# Altium PCB Zavrsni.PcbDoc
Units mil, origin at the board's own origin, x right, y up, seen from the top; angles counter-clockwise.
Board outline 3740.16 x 1968.5 mil, 2 copper layers (Top Layer, Bottom Layer); 18 components, 15 nets, 92 pads, 0 vias.
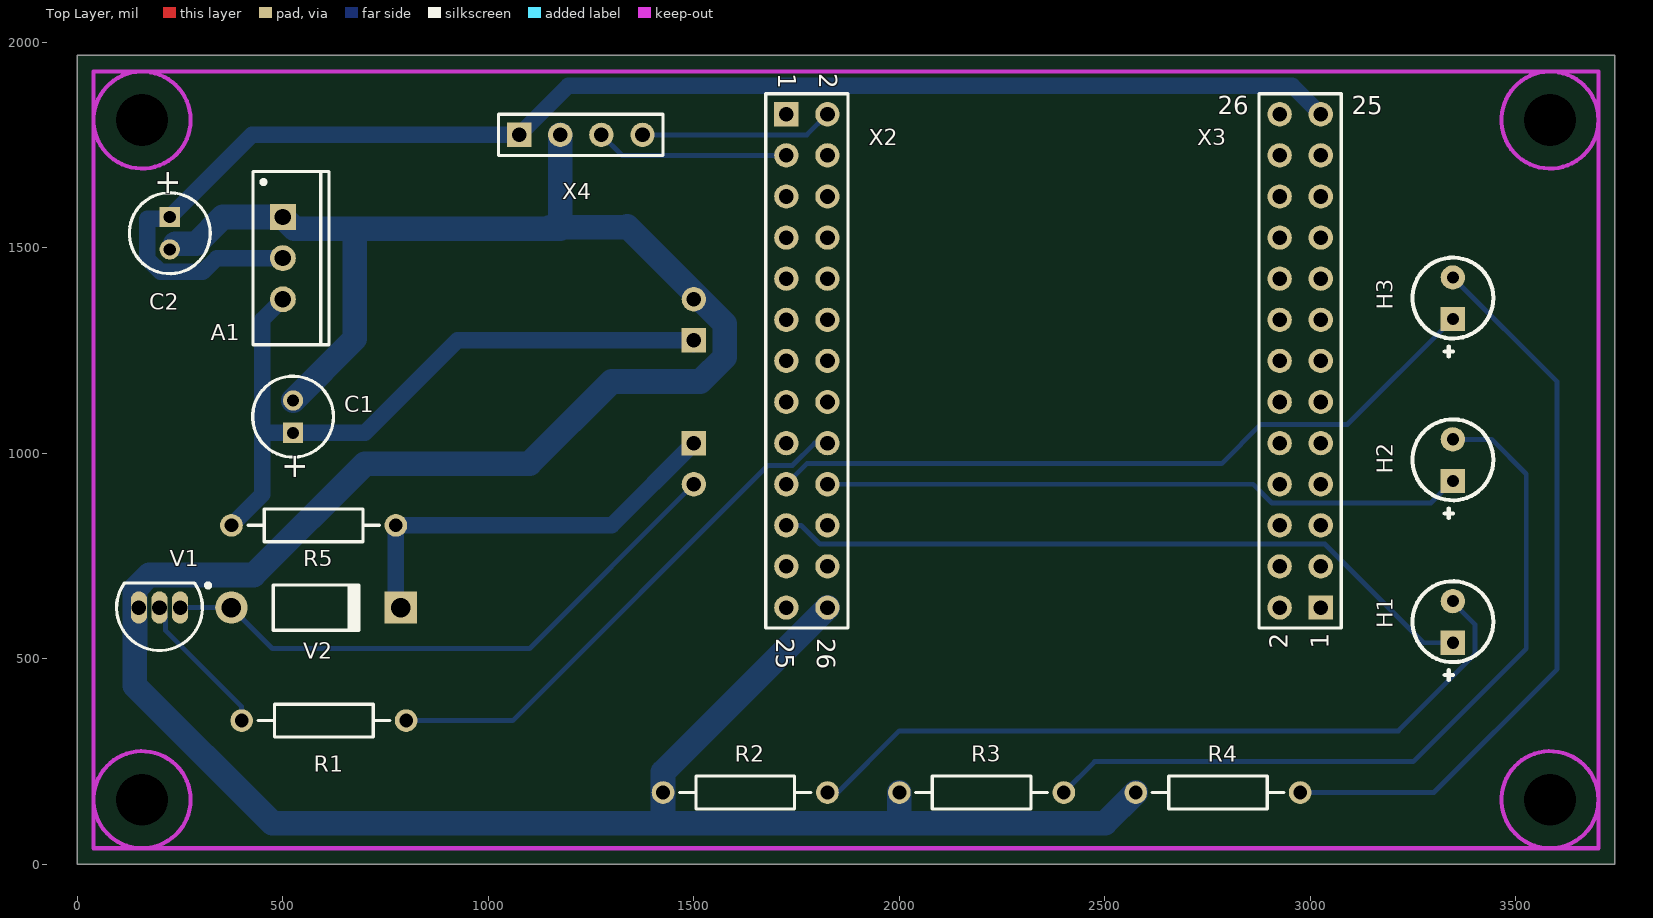
[diagram p0: Top Layer view]
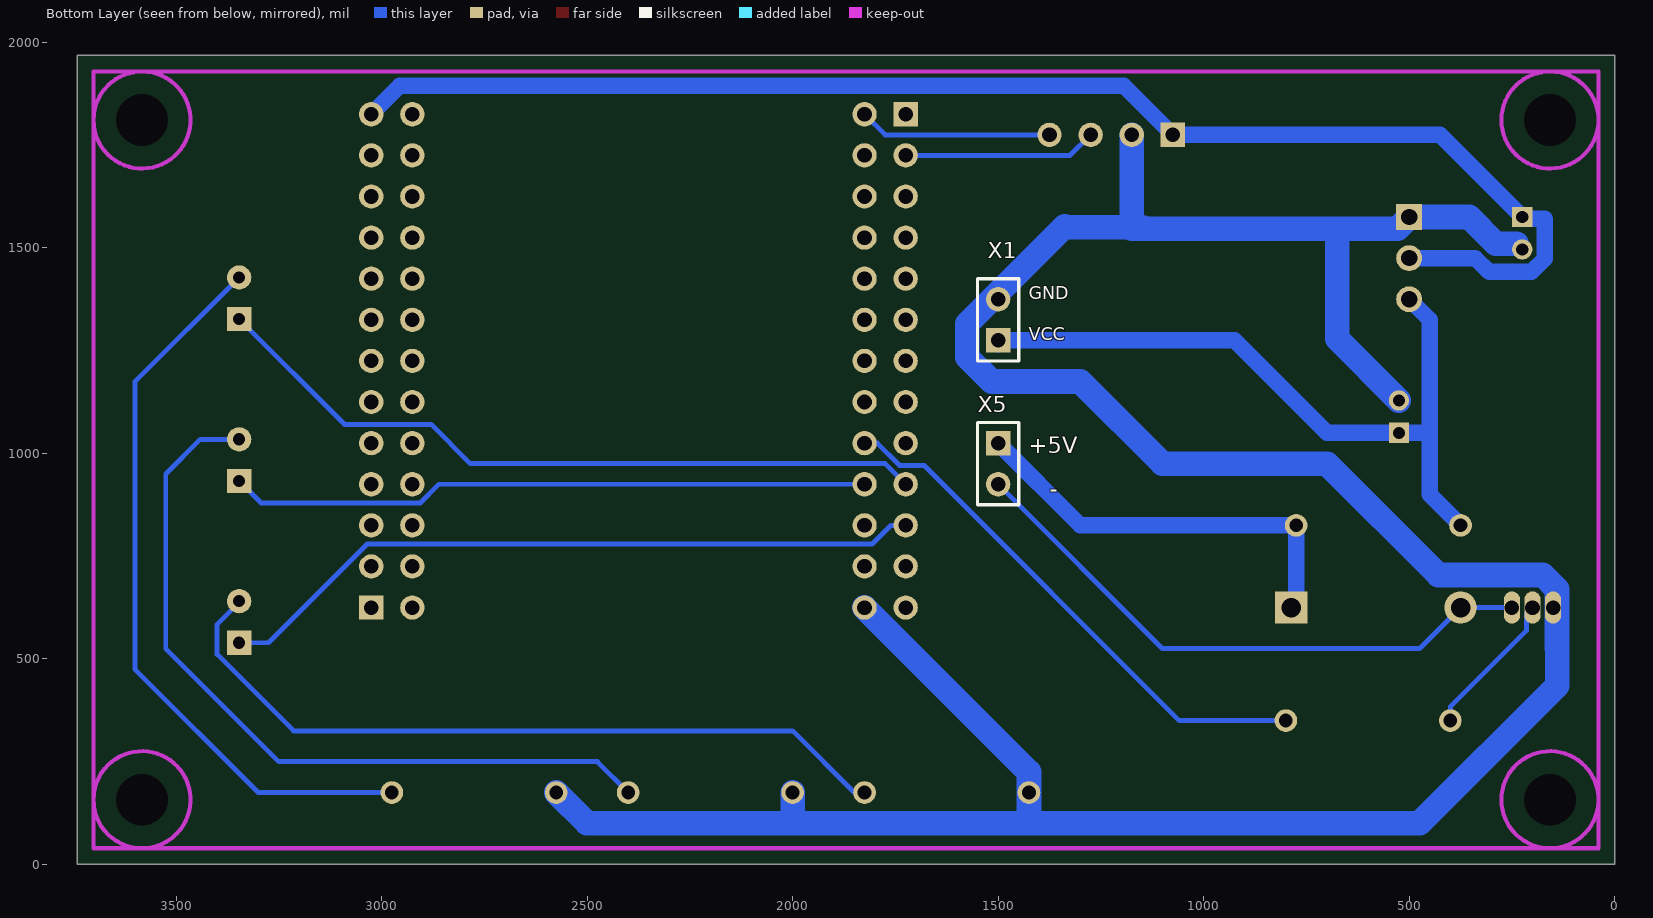
[diagram p1: Bottom Layer view, seen from below]

## Layer stack, top to bottom
Top Solder: solder mask 0.4, Solder Resist, Dk 3.5
Top Layer: signal copper 1.4
Dielectric 1: dielectric 12.6, FR-4, Dk 4.8
Bottom Layer: signal copper 1.4
Bottom Solder: solder mask 0.4, Solder Resist, Dk 3.5

## Board outline
0,0 3740.16,0 3740.16,1968.5 0,1968.5

## Design rules (kind name [scope] priority, off if disabled: settings)
Clearance [All] p1: gap=10
HoleSize [All] p1: absolutevalues=TRUE maxlimit=125.98 minlimit=1 maxpercent=80.000 minpercent=20.000
MinimumSolderMaskSliver [All] p1: minsoldermaskwidth=2
PolygonConnect [All] p1: connectstyle=Relief reliefconductorwidth=10 reliefentries=4 polygonreliefangle="90 Angle" airgapwidth=10
RoutingVias [All] p1: holewidth=28 width=50 viastyle="Through Hole" minholewidth=28 minwidth=50 maxholewidth=28 maxwidth=50
SilkToSolderMaskClearance [IsPad] p1: minsilkscreentomaskgap=2 clearancetoexposedcopper=TRUE
SolderMaskExpansion [All] p1: expansion=4
Width [All] p1: maxlimit=60 minlimit=12 preferedwidth=12
27 further rules are at their usual default settings.

## Components (designator, comment, footprint, x,y, rotation, side; value= is the part's Value field where it differs from the comment)
A1 "LM1117T-3.3" T03B 500,1475 r270 top
C1 "100u/16V" CAPPR2-5x6.8 525,1089.37 r90 top
C2 "10u/16V" CAPPR2-5x6.8 225,1535.63 r270 top
H1 "LED1" "LED dioda" 3346.46,590.55 r90 top
H2 "LED1" "LED dioda" 3346.46,984.25 r90 top
H3 "LED1" "LED dioda" 3346.46,1377.95 r90 top
R1 "4K7" AXIAL-0.4 600,350 r180 top
R2 "1K" AXIAL-0.4 1625,175 r0 top
R3 "1K" AXIAL-0.4 2200,175 r0 top
R4 "1K" AXIAL-0.4 2775,175 r0 top
R5 "68" AXIAL-0.4 575,825 r180 top
V1 "NPN" TO-226-AA 200,625 r90 top
V2 "Diode 1N4004" DO-41 580.91,625 r0 top
X1 "Header 2" HDR1X2 1500,1275 r90 bottom
X2 "Header 13X2" HDR2X13 1725,1825 r270 top
X3 "Header 13X2" HDR2X13 3025,625 r90 top
X4 "Header 4" HDR1X4 1075,1775 r0 top
X5 "Header 2" HDR1X2 1500,1025 r270 bottom

## Footprints (in the part's own frame and the unit in brackets; to place one, negate y for a bottom-side part, rotate by r counter-clockwise, add the part's x,y. Pads: shape width x height; smd on the part's side, far side on the other; paste and mask are expansions set on the pad)
AXIAL-0.4 [mm] "Axial Device, Thru-Hole; 2 Leads; 0.4 in Pin Spacing"
  round 1.4 hole 0.85: 1(-5.08,0) 2(5.08,0)
  silkscreen extent -4.06,-1.02 4.06,1.02
CAPPR2-5x6.8 [mm] "Capacitor, Electrolytic, Radial; Body 5 x 6.8 mm (Dia.xH typ); Pin Spacing 2 mm (typ)"
  rect 1.25x1.25 hole 0.75: 1(-1,0)
  round 1.25 hole 0.75: 2(1,0)
  silkscreen extent -2.5,-2.5 2.5,2.5
DO-41 [mm] "Diode, Axial; Body 5.2 x 2.7 mm (LxDia. max), Lead Dia. 0.86 mm (max)"
  round 2 hole 1.2: 1(-5.23,0)
  rect 2x2 hole 1.2: 2(5.23,0)
  silkscreen extent -2.65,-1.4 2.75,1.4
HDR1X2 [mm] "Connector; Header; 2 Position"
  rect 1.5x1.5 hole 0.9: 1(0,0)
  round 1.5 hole 0.9: 2(2.54,0)
  silkscreen extent -1.27,-1.27 3.81,1.27
HDR1X4 [mm] "Connector; Header; 4 Position"
  rect 1.5x1.5 hole 0.9: 1(0,0)
  round 1.5 hole 0.9: 2(2.54,0) 3(5.08,0) 4(7.62,0)
  silkscreen extent -1.27,-1.27 8.89,1.27
HDR2X13 [mm] "Connector; Header; 13x2 Position"
  rect 1.5x1.5 hole 0.9: 1(0,0)
  round 1.5 hole 0.9: 2(0,2.54) 3(2.54,0) 4(2.54,2.54) 5(5.08,0) 6(5.08,2.54) 7(7.62,0) 8(7.62,2.54) 9(10.16,0) 10(10.16,2.54) 11(12.7,0) 12(12.7,2.54) 13(15.24,0) 14(15.24,2.54) 15(17.78,0) 16(17.78,2.54) 17(20.32,0) 18(20.32,2.54) 19(22.86,0) 20(22.86,2.54) 21(25.4,0) 22(25.4,2.54) 23(27.94,0) 24(27.94,2.54) 25(30.48,0) 26(30.48,2.54)
  silkscreen extent -1.27,-1.27 31.75,3.81
"LED dioda" [mm]
  rect 1.5x1.5 hole 0.75: 1(-1.3,0)
  round 1.5 hole 0.75: 2(1.27,0)
  silkscreen extent -3.6,-2.5 2.5,2.5
T03B [mm] "TO, Thru-Hole, Vertical, Heatsink Mounted; 3 In-Line Leads; Pitch 2.54 mm"
  rect 1.6x1.6 hole 1: 1(-2.54,0)
  round 1.6 hole 1: 2(0,0) 3(2.54,0)
  silkscreen extent -5.35,-1.85 5.35,2.85, body extent -5.4,-1.9 5.4,2.9, height 19.4
TO-226-AA [mm] "TO, Flat Index; 3 In-Line, Axial Leads; Body Dia. 4.8mm; Leads 0.55 x 0.51 mm (max)"
  oval 2x1 hole 0.9: 1(0,-1.27) 2(0,0) 3(0,1.27)
  silkscreen extent -2.65,-3.13 1.52,2.65, body extent -2.65,-2.66 1.52,2.66, height 5.33

## Part data
A1: "800mA Low-Dropout Linear Regulator, 3-pin TO-220"
C1 C2: library part Elko, "Electrolytic capacitor"
H1: "LED zelena"
H2: "LED žuta"
H3: "LED crvena"
R1 R2 R3 R4 R5: library part Res2, "Resistor"
V1: "NPN Bipolar Transistor"
V2: "1 Amp General Purpose Rectifier"
X1 X5: "Header, 2-Pin"
X2 X3: "Header, 13-Pin, Dual row"
X4: "Header, 4-Pin"

## Free pads (board coordinates)
  round 118.11 hole 125.98: 0(157.48,157.48) 0(157.48,1811.02) 0(3582.68,157.48) 0(3582.68,1811.02)

## Nets (pads, with @x,y where several pads share a name; then routed paths per layer and width w, separated by ;. In a path a pad name is that pad's centre, name@x,y a point inside that pad or via, vN(x,y) a via of type N, cw(c..) or ccw(c..) an arc to the next point about the centre after c; other vN are vias at no path point)
3V3: A1.2 C2.1 X3.25 X4.1 | length 3473.5
  Bottom Layer w40: C2.1 425,1775 X4.1 1194.13,1894.13 2955.87,1894.13 X3.25 ; C2.1@229.61,1570.39 170.39,1570.39 170.39,1473.64 202.38,1441.65 305.72,1441.65 339.07,1475 A1.2
GND: A1.1 C1.2 C2.2 R2.1 R3.1 R4.1 V1.3 X1.2 X2.26 X4.2 | length 7564.8
  Bottom Layer w60: C2.2@239.13,1510.39 289.61,1510.39 354.21,1575 A1.1 528.5,1546.5 675,1546.5 ; C1.2 675,1278.74 675,1546.5 ; 1150,1550 1338.39,1550 1337.72,1552.9 1575,1315.62 1575,1234.38 1515.62,1175 1300,1175 1100,975 700,975 429.37,704.37 175.28,704.37 140.32,669.41 140.32,525.36 139.95,525 139.95,435.05 475,100 1425,100 ; X4.2 1175,1546.5 675,1546.5 ; X2.26 1425,225 R2.1 1425,100 ; R3.1 2000,100 ; R4.1 2500,100 2000,100 ; 1425,100 2000,100
LED_1: H1.1 X2.21 | length 1739.8
  Bottom Layer w12: X2.21 1760.61,825 1806.14,779.47 3034.91,779.47 3275.02,539.37 H1.1
LED_2: H2.1 X2.20 | length 1562.5
  Bottom Layer w12: X2.20 2860.61,925 2906.14,879.47 3292.86,879.47 H2.1
LED_3: H3.1 X2.19 | length 1787.9
  Bottom Layer w12: X2.19 1775,975 2783.94,975 2879.47,1070.53 3090.21,1070.53 H3.1
NetH1_2: H1.2 R2.2 | length 1862.7
  Bottom Layer w12: R2.2 1850,175 2000,325 3213.77,325 3400,511.23 3400,583.97 H1.2@3346.46,637.51
NetH2_2: H2.2 R3.2 | length 1908.4
  Bottom Layer w12: R3.2 2475,250 3250,250 3525,525 3525,950 3440.75,1034.25 H2.2
NetH3_2: H3.2 R4.2 | length 1807.2
  Bottom Layer w12: R4.2 3300,175 3600,475 3600,1174.41 H3.2
NetR1_1: R1.1 X2.18 | length 1273.5
  Bottom Layer w12: R1.1 1058.94,350 1679.47,970.53 1739.41,970.53 1793.89,1025
NetR1_2: R1.2 V1.2 | length 357.8
  Bottom Layer w12: V1.2 214.32,610.68 214.32,569.63 400,383.95 R1.2
NetR5_1: R5.1 V2.2 X5.1 | length 996
  Bottom Layer w40: V2.2@775,636.81 R5.1 1300,825 X5.1
NetV1_1: V1.1 V2.1 X5.2 | length 1457.1
  Bottom Layer w12: V1.1 V2.1 475,525 1100,525 X5.2
NetX2_3: X2.3 X4.3 | length 470.7
  Bottom Layer w12: X4.3 1325,1725 X2.3
TXD: X2.2 X4.4 | length 470.7
  Bottom Layer w12: X4.4 1775,1775 X2.2
VCC: A1.3 C1.1 R5.2 X1.1 | length 1755
  Bottom Layer w40: R5.2 450,900 450,1050 ; A1.3 450,1325 450,1050 ; X1.1@1500,1265 X1.1 925,1275 700,1050 C1.1 450,1050
pads on no net: X2.1 X2.4 X2.5 X2.6 X2.7 X2.8 X2.9 X2.10 X2.11 X2.12 X2.13 X2.14 X2.15 X2.16 X2.17 X2.22 X2.23 X2.24 X2.25 X3.1 X3.2 X3.3 X3.4 X3.5 X3.6 X3.7 X3.8 X3.9 X3.10 X3.11 X3.12 X3.13 X3.14 X3.15 X3.16 X3.17 X3.18 X3.19 X3.20 X3.21 X3.22 X3.23 X3.24 X3.26

## Keep-outs
Keep-Out Layer:
  circle w10: c157.48,1811.02 r118.11
  circle w10: c157.48,157.48 r118.11
  circle w10: c3582.68,157.48 r118.11
  circle w10: c3582.68,1811.02 r118.11
  lines w10: 39.37,39.37 39.37,1929.13 3700.79,1929.13 3700.79,39.37 39.37,39.37

## Silkscreen, mask and mechanical layers (free items; w line width, h text height)
Bottom Overlay:
  text "GND" at 1425,1375 h31.5
  text "VCC" at 1425,1275 h31.5
  text "+5V" at 1425,1000 h40
  text "-" at 1375,925 h40 r180
Mechanical 1:
  the board outline again, w10

## Dimensions
0,0 to 3740.16,0 on Mechanical 2
3740.16,0 to 3740.16,1968.5 on Mechanical 2

## Text inside footprints (layer, text, board x,y; h text height)
C1: Top Overlay "+" at 554.53,932.87 h59.06 r90
C2: Top Overlay "+" at 195.47,1692.13 h59.06 r270
X2: Top Overlay "26" at 1800,550 h43.31 r270; Top Overlay "25" at 1700,550 h43.31 r270; Top Overlay "1" at 1705,1925 h43.31 r270; Top Overlay "2" at 1805,1925 h43.31 r270
X3: Top Overlay "26" at 2775,1825 h43.31; Top Overlay "25" at 3100,1825 h43.31; Top Overlay "1" at 3045,525 h43.31 r90; Top Overlay "2" at 2945,525 h43.31 r90